# Altium PCB controller.PcbDoc
Units mm, origin at the board's own origin, x right, y up, seen from the top; angles counter-clockwise.
Board outline 24.38 x 33.27 mm, 2 copper layers (Top Layer, Bottom Layer); 16 components, 47 nets, 54 pads, 5 vias.
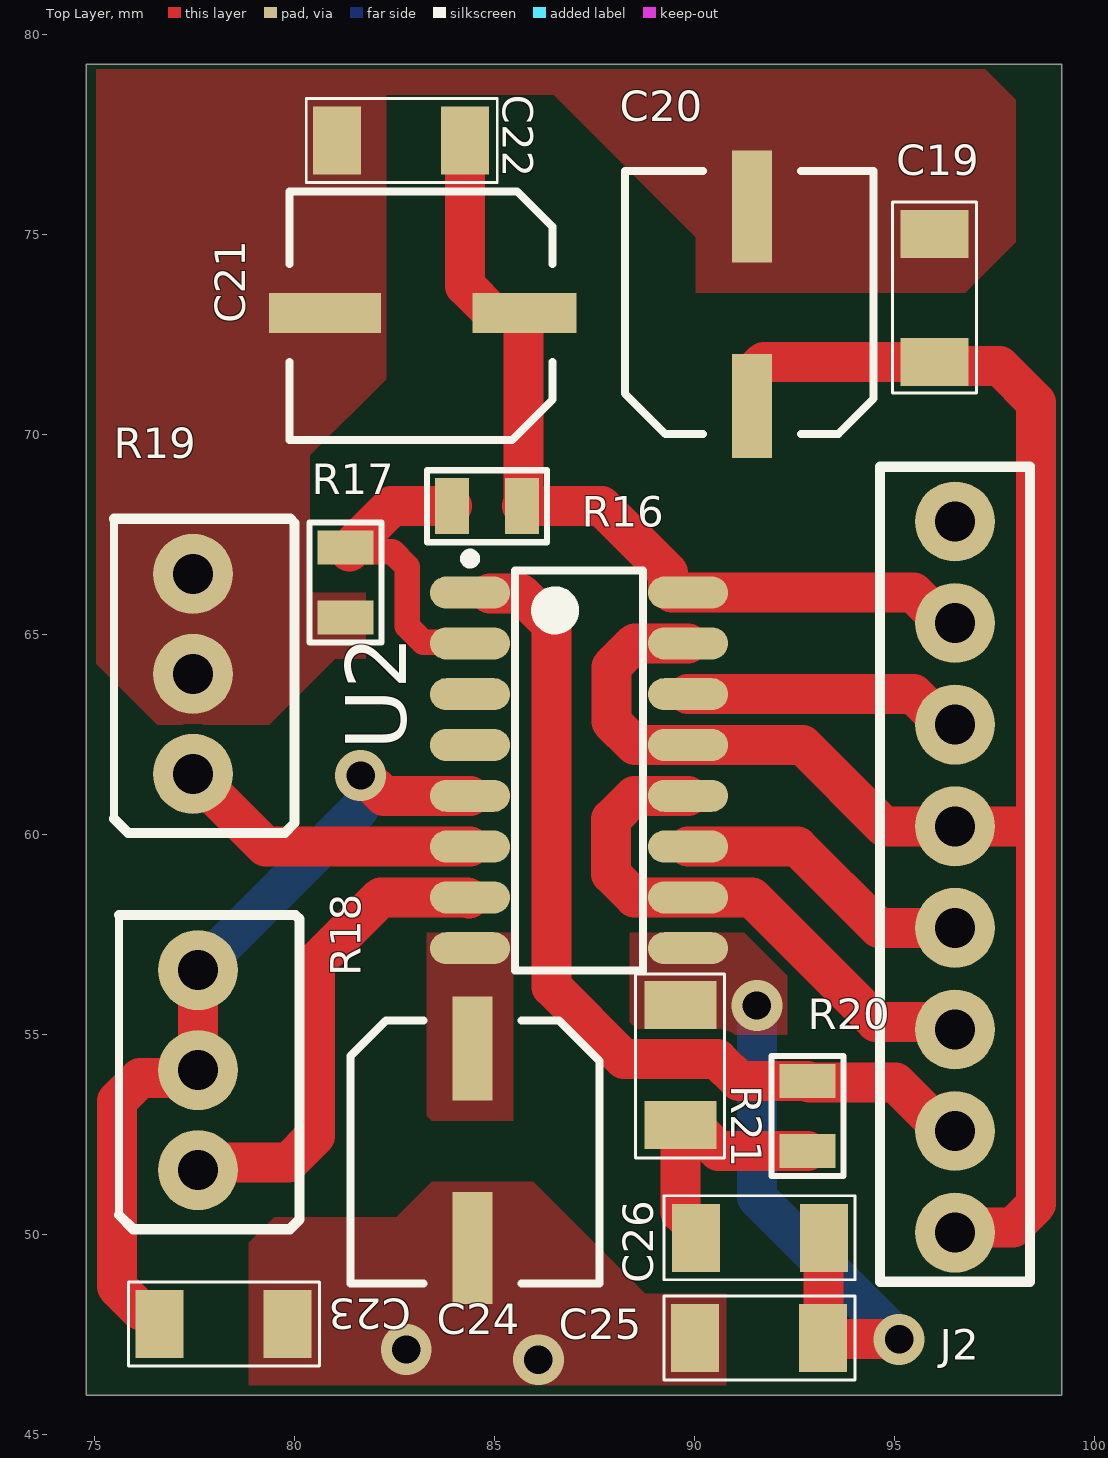
[diagram p0: Top Layer view]
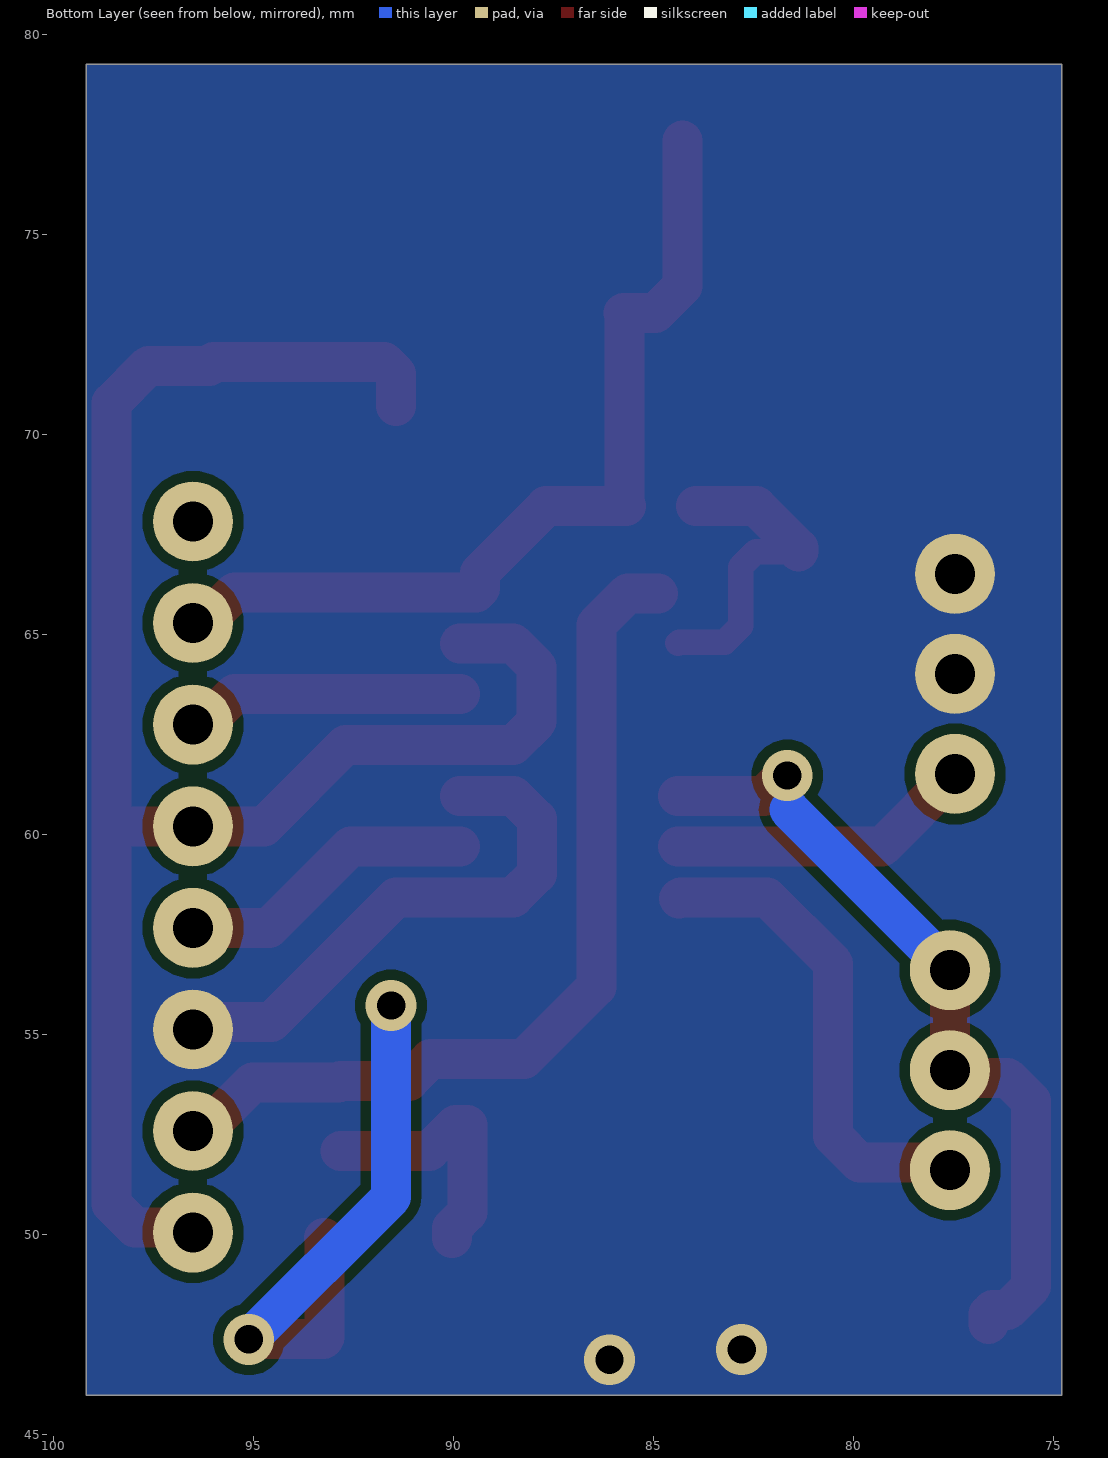
[diagram p1: Bottom Layer view, seen from below]
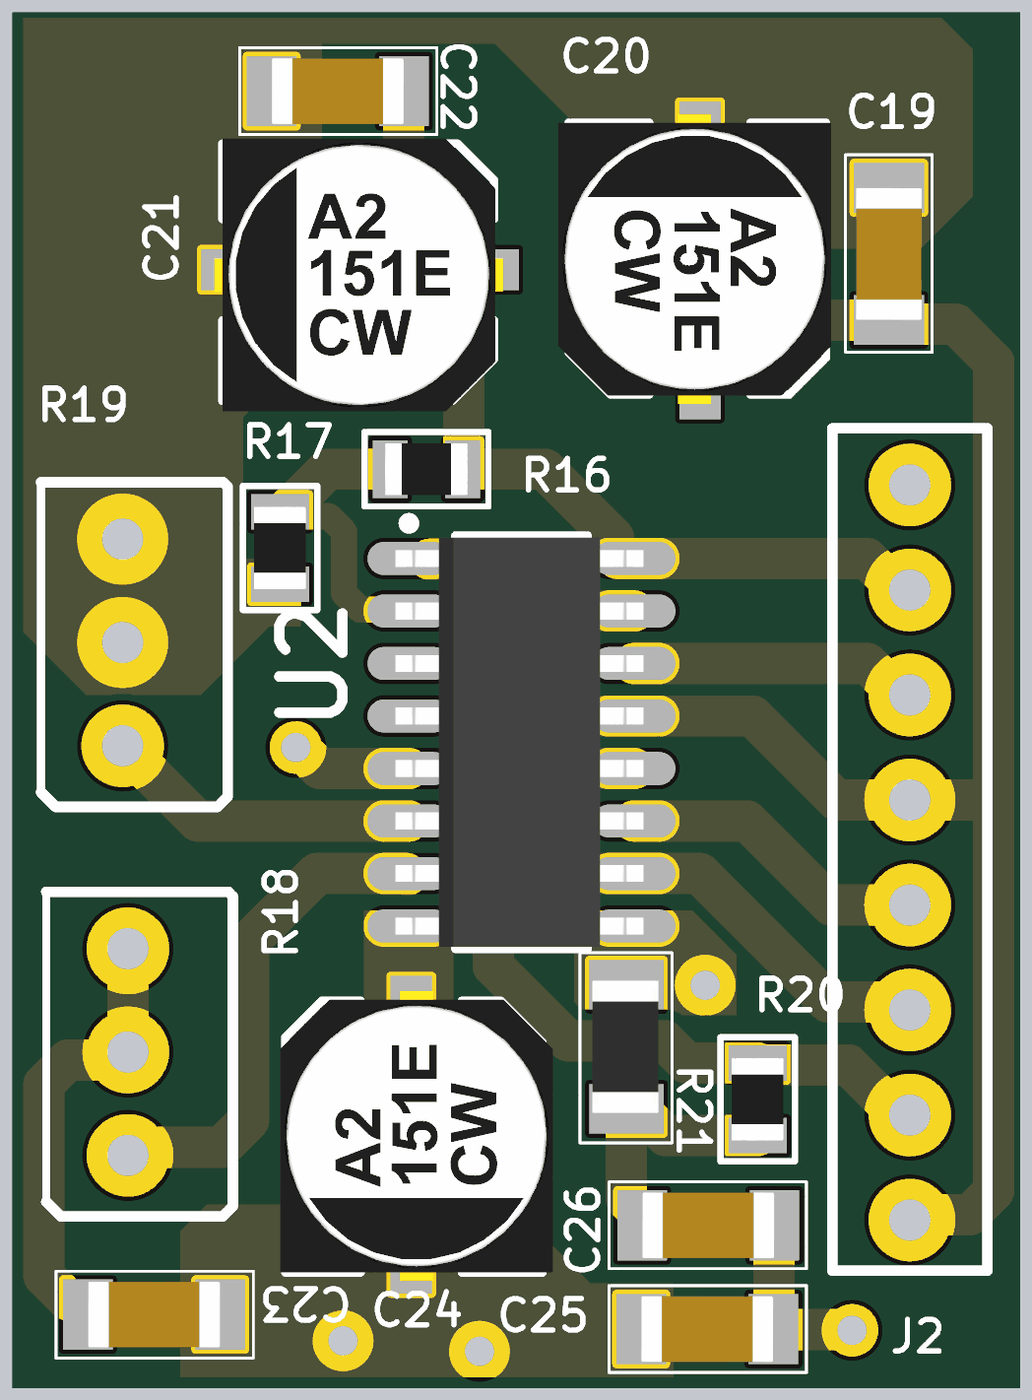
[diagram p2: 3D render of the assembled board from above, using the file's embedded part models]

## Layer stack, top to bottom
Top Solder: solder mask 0.0102, Solder Resist, Dk 3.5
Top Layer: signal copper 0.0356
Dielectric 1: dielectric 0.32, FR-4, Dk 4.8
Bottom Layer: signal copper 0.0356
Bottom Solder: solder mask 0.0102, Solder Resist, Dk 3.5

## Board outline
74.803,45.974 74.803,79.248 99.187,79.248 99.187,45.974

## Design rules (kind name [scope] priority, off if disabled: settings)
Clearance [All] p1: gap=0.254 ignorepadtopadclearanceinfootprint=FALSE except(0: Arc-Hole Track-Hole SMDPad-Hole THPad-Hole Via-Hole Fill-Hole Poly-Hole Region-Hole Text-Hole)
PolygonConnect [All] p1: connectstyle=Direct reliefconductorwidth=0.254 reliefentries=4 polygonreliefangle="90 Angle" airgapwidth=0.254
RoutingVias [All] p1: holewidth=0.711 width=1.27 viastyle="Through Hole" minholewidth=0.711 minwidth=1.27 maxholewidth=0.711 maxwidth=1.27
SolderMaskExpansion [All] p1: expansion=0.102 istentingtop=FALSE
Width [All] p1: maxlimit=254 minlimit=0.254 preferedwidth=0.254 minimp=50.000000 maximp=50.000000 favimp=50.000000
30 further rules are at their usual default settings.

## Components (designator, comment, footprint, x,y, rotation, side; value= is the part's Value field where it differs from the comment)
C19 "uF" C-1206 96.012,73.406 r270 top
C20 "50v 22uF" "50v 22uf" 91.44,73.406 r90 top
C21 "50v 22uF" "50v 22uf" 83.058,73.025 r180 top
C22 "uF" C-1206 82.677,77.343 r180 top
C23 "uF" C-1206 78.232,47.752 r180 top
C24 "50v 22uF" "50v 22uf" 84.455,51.943 r270 top
C25 "uF" C-1206 91.618,47.401 r180 top
C26 "uF" C-1206 91.643,49.911 r0 top
J2 "8 Pin" "8 pin connector" 96.52,50.038 r0 top
R16 "R" R-0805R 84.822,68.199 r0 top
R17 "R" R-0805R 81.28,66.294 r90 top
R18 "R-pot_1" pot 77.597,56.602 r0 top
R19 "R-pot_1" pot 77.47,66.508 r0 top
R20 "R" R-0805R 92.837,52.959 r270 top
R21 "R-1206" R-1206 89.662,54.229 r90 top
U2 "SG3525AP013TR" "SOIC16N SG3525" 87.122,61.595 r0 top

## Footprints (in the part's own frame and the unit in brackets; to place one, negate y for a bottom-side part, rotate by r counter-clockwise, add the part's x,y. Pads: shape width x height; smd on the part's side, far side on the other; paste and mask are expansions set on the pad)
"8 pin connector" [mm]
  round 2 hole 1: 1(0,0) 2(0,2.54) 3(0,5.08) 4(0,7.62) 5(0,10.16) 6(0,12.7) 7(0,15.24) 8(0,17.78)
  silkscreen extent -1.88,-1.22 1.88,19.15
"50v 22uf" [mm] "Aluminum Electrolytic Capacitor, Body 6.70x6.70x6.30mm, IPC Low Density"
  rect 2.6x1 smd: 1(-2.7,0)
  rect 2.8x1 smd: 2(2.286,0)
  silkscreen extent -3.4,-3.05 3.18,3.18, body extent -3.63,-3.17 3.37,3.43, height 6.92
C-1206 [mm]
  rect 1.2x1.7 smd: 1(-1.6,0) 2(1.6,0)
  silkscreen extent -2.4,-1.05 2.37,1.05, body extent -1.6,-0.8 1.6,0.8, height 1
pot [mm]
  round 2 hole 1: 1(0,0) 2(0,-2.5) 3(0,-5)
  silkscreen extent -1.97,-6.48 2.54,1.38, body extent -2.08,-7.34 2.92,2.26, height 11.36
R-0805R [mm] "resistor 0805 reflow soldering"
  rect 0.85x1.4 smd: 1(-0.875,0) 2(0.875,0)
  silkscreen extent -1.5,-0.9 1.5,0.9, body extent -1,-0.62 1,0.63, height 0.5
R-1206 [mm]
  rect 1.2x1.8 smd: 1(-1.5,0) 2(1.5,0)
  silkscreen extent -2.32,-1.1 2.27,1.12, body extent -1.6,-0.78 1.6,0.83, height 0.56
"SOIC16N SG3525" [mm] "SOIC, 16-Leads, Body 9,90x3,90mm, Pitch 1,27mm, IPC Medium Density"
  oval 2x0.8 smd: 1(-2.725,4.445) 2(-2.725,3.175) 3(-2.725,1.905) 4(-2.725,0.635) 5(-2.725,-0.635) 6(-2.725,-1.905) 7(-2.725,-3.175) 8(-2.725,-4.445) 9(2.725,-4.445) 10(2.725,-3.175) 11(2.725,-1.905) 12(2.725,-0.635) 13(2.725,0.635) 14(2.725,1.905) 15(2.725,3.175) 16(2.725,4.445)
  silkscreen extent -2.85,-5 1.6,5.42, body extent -3.05,-4.95 2.95,4.95, height 1.26

## Part data
C19 C22 C23 C25 C26: library part C-1206
C20 C21 C24: Capacitance=4.7mF, Case/Package=Radial, Manufacturer=Nichicon, Manufacturer Part Number=LKS1J472MESZ, Max Operating Temperature=85°C, Min Operating Temperature=-40°C, Package Quantity=250, Ripple Current=3A, Supplier Part Number 1=647-LKS1J472MESZ, Tolerance=20%, Voltage Rating=63V, ComponentLink3Description=Link, ComponentLink3URL=https://ozdisan.com/passive-components/capacitors/aluminum-capacitors/MRW-050V220ME057-TR, Diameter=22mm, Height - Seated (Max)=1.772inch, Lead Pitch=0.394inch, Length=45mm, Life (Hours)=1000Hour, Mount="Through Hole", Packaging=Bulk, RoHS=Yes, Supplier 1=Mouser, Termination="Snap in", Voltage Rating (DC)=63V
R16 R17 R20: library part "R 0805"
R18 R19 R21: "Res1206"
U2: "IC REG CTRLR BCK/PSH-PULL 16SOIC", Case/Package=SOIC, Manufacturer=STMicroelectronics, Max Frequency=500kHz, Max Operating Temperature=70°C, Max Supply Current=20mA, Max Supply Voltage=35V, Min Operating Temperature=0°C, Operating Supply Current=14mA, Output Current=400A, Output Voltage=5.2V, Package Quantity=1, Supplier Part Number 1=497-6479-1-ND, Switching Frequency=400kHz, ComponentLink1Description=http://www.st.com/content/ccc/resource/technical/document/datasheet/c0/12/98/4a/3b/1a/4b/8b/CD00000958.pdf/files/CD00000958.pdf/jcr:content/translations/en.CD00000958.pdf?src-supplier=Digi-Key, ComponentLink1URL=http://www.st.com/content/ccc/resource/technical/document/datasheet/c0/12/98/4a/3b/1a/4b/8b/CD00000958.pdf/files/CD00000958.pdf/jcr:content/translations/en.CD00000958.pdf?src-supplier=Digi-Key, ComponentLink2Description=https://www.verical.com/server-webapp/html/getDatasheet?partID=376579&src-supplier=Verical, ComponentLink2URL=https://www.verical.com/server-webapp/html/getDatasheet?partID=376579&src-supplier=Verical, ComponentLink3Description=http://www.produktinfo.conrad.com/datenblaetter/1100000-1199999/001185611-da-01-en-IC_REG_CTRLR_P_SG3525AP013TR_SOIC_16_STM.pdf?src-supplier=Conrad, ComponentLink3URL=http://www.produktinfo.conrad.com/datenblaetter/1100000-1199999/001185611-da-01-en-IC_REG_CTRLR_P_SG3525AP013TR_SOIC_16_STM.pdf?src-supplier=Conrad, Duty Cycle=49%, Fall Time=50ns, Lead Free="Lead Free", Manufacturer Part Number=SG3525AP013TR, Max Duty Cycle=49%, Mount="Surface Mount", Number of Outputs=2, Number of Pins=16, Packaging="Tape and Reel", Pricing 1="1 = 1,58000, 10 = 1,41600, 100 = 1,10400, 500 = 0,91196, 1000 = 0,71997 (USD)", Radiation Hardening=No, Rise Time=100ns, RoHS=Yes, Stock 1=5712, Supplier 1=Digi-Key, Weight=0.007079oz

## Via types
v1: diameter 1.27, hole 0.711, Top Layer to Bottom Layer, 5 vias

## Nets (pads, with @x,y where several pads share a name; then routed paths per layer and width w, separated by ;. In a path a pad name is that pad's centre, name@x,y a point inside that pad or via, vN(x,y) a via of type N, cw(c..) or ccw(c..) an arc to the next point about the centre after c; other vN are vias at no path point)
5V: 
5V_gnd: C19.1 C20.2 C21.2 C22.2 C23.1 C24.2 C25.2 J2.3 R17.1 R19.1 R19.2 U2.10 U2.12 | length 13.7
  Top Layer w1: U2.12 88.509,60.96 87.923,60.374 87.923,59.006 88.509,58.42 89.009,58.42 91.44,58.42 94.551,55.309 96.329,55.309 J2.3
  other v1: 86.106,46.863 82.804,47.117
12v: C19.2 C20.1 J2.1 J2.5 U2.13 U2.15 | length 46.1
  Top Layer w1: U2.15 88.516,64.77 87.931,64.184 87.931,62.816 88.516,62.23 U2.13 92.71,62.23 94.742,60.198 J2.5 98.552,60.198 ; C20.1 91.44,71.506 91.74,71.806 C19.2 96.112,71.706 97.634,71.706 98.552,70.788 98.552,60.198 ; J2.1 96.647,50.165 97.966,50.165 98.552,50.751 98.552,60.198
GND: 
GND1: 
inv: J2.2 R20.1 U2.1 | length 22.5
  Top Layer w1: U2.1@84.897,66.021 85.647,66.021 86.437,65.231 86.437,56.184 88.246,54.375 90.582,54.375 91.123,53.834 R20.1 92.881,53.79 95.037,53.79 96.249,52.578 J2.2
L: 
N: 
Netbr1_4: 
NetC1_1: 
NetC4_1: 
NetC6_1: 
NetC6_2: 
NetC13_1: 
NetC13_2: 
NetC14_1: 
NetC14_2: 
NetC15_1: 
NetC15_2: 
NetC21_1: C21.1 C22.1 J2.7 R16.2 U2.16 | length 22.5
  Top Layer w1: C22.1 84.277,73.706 84.958,73.025 C21.1@85.727,73.025 ; C21.1 C21.1@85.727,73.025 ; J2.7 96.249,65.278 95.487,66.04 89.447,66.04 89.347,66.14 89.347,66.54 87.688,68.199 R16.2 85.727,68.23 C21.1@85.727,73.025
NetC23_2: C23.2 R18.1 R18.2 U2.5 | length 19.7
  Top Layer w1: C23.2 76.632,48.002 76.532,48.102 76.151,48.102 75.565,48.688 75.565,53.325 76.151,53.911 77.406,53.911 R18.2 R18.1 ; v1(81.661,61.468) 81.734,61.468 82.242,60.96 U2.5
  Bottom Layer w1: R18.1 81.609,60.614
NetC24_1: C24.1 U2.8
NetC25_1: C25.1 C26.2 R21.2 U2.9 | length 14.2
  Top Layer w1: C26.2 93.231,49.899 93.231,47.414 93.258,47.386 95.108,47.386 v1(95.123,47.371)
  Bottom Layer w1: v1(91.568,55.718) 91.568,50.926 v1(95.123,47.371)
NetC26_1: C26.1 R20.2 R21.1 | length 6.4
  Top Layer w1: C26.1 90.043,50.161 89.662,50.542 R21.1 89.962,52.729 90.607,52.084 R20.2
NetF1_2: 
NetG1_1: 
NetG1_5: 
NetG1_9: 
NetG1_11: 
NetJ1_4: 
NetJ1_6: 
NetJ2_4: J2.4 U2.11 | length 7.9
  Top Layer w0.635: J2.4@96.259,57.919 J2.4
  Top Layer w1: U2.11 92.583,59.69 94.615,57.658 J2.4
NetJ2_6: J2.6 U2.14 | length 7
  Top Layer w1: U2.14 95.487,63.5 96.249,62.738 J2.6
NetL1_1: 
NetQ1_1: 
NetQ1_2: 
NetQ2_1: 
NetQ4_1: 
NetQ4_2: 
NetQ5_1: 
NetR16_1: R16.1 R17.2 U2.2 | length 8.1
  Top Layer w0.635: R17.2@81.388,67.061 82.454,67.061 82.825,66.69 82.825,65.202 83.226,64.802 84.365,64.802 U2.2 ; R16.1@83.839,68.072 83.947,68.18 R16.1
  Top Layer w1: R17.2@81.388,67.061 81.388,67.152 82.435,68.199 R16.1
NetR18_3: R18.3 U2.7 | length 12.2
  Top Layer w0.635: U2.7@84.365,58.388 U2.7
  Top Layer w1: R18.3 77.788,51.793 79.86,51.793 80.518,52.451 80.518,56.769 82.169,58.42 84.334,58.42 U2.7@84.365,58.388
NetR19_3: R19.3 U2.6 | length 7.7
  Top Layer w1: R19.3 79.288,59.69 U2.6
pN: 
VDC: 
Vout: 
vref: 
pads on no net: J2.8 U2.3 U2.4

## Polygon pours and split planes (outlines as drawn)
NetC25_1 on Top Layer "NETC25_1_L01_P003" (solid, pour order 3): 92.329,57.531 88.392,57.531 88.392,55.245 88.646,54.991 92.329,54.991
NetC24_1 on Top Layer "NETC24_1_L01_P002" (solid, pour order 2): 85.471,57.531 83.312,57.531 83.312,52.959 83.439,52.832 85.471,52.832
5V_gnd on Top Layer "5V_GND_L01_P001" (solid, pour order 1): 78.867,49.784 79.502,50.419 82.55,50.419 83.439,51.308 85.979,51.308 88.773,48.514 90.805,48.514 90.805,46.228 78.867,46.228
5V_gnd on Top Layer "5V_GND_L01_P000" (solid, pour order 0): 97.282,79.121 98.044,78.359 98.044,74.803 96.774,73.533 90.043,73.533 90.043,74.93 86.487,78.486 82.296,78.486 82.296,71.374 80.391,69.469 80.391,66.04 81.788,66.04 81.788,64.389 81.026,64.389 79.375,62.738 76.581,62.738 75.057,64.262 75.057,79.121
5V_gnd on Bottom Layer "5V_GND_L02_P004" (solid, pour order 4): 74.803,79.248 99.187,79.248 99.187,45.974 74.803,45.974

## Silkscreen, mask and mechanical layers (free items; w line width, h text height)
Mechanical 1:
  the board outline again, w0.254